# Altium PCB PCB_Alvaro.PcbDoc
Units mm, origin at the board's own origin, x right, y up, seen from the top; angles counter-clockwise.
Board outline 65.26 x 58.66 mm, 2 copper layers (Top Layer, Bottom Layer); 22 components, 36 nets, 127 pads, 0 vias.
Unrouted connection lines stored in the file: 10.
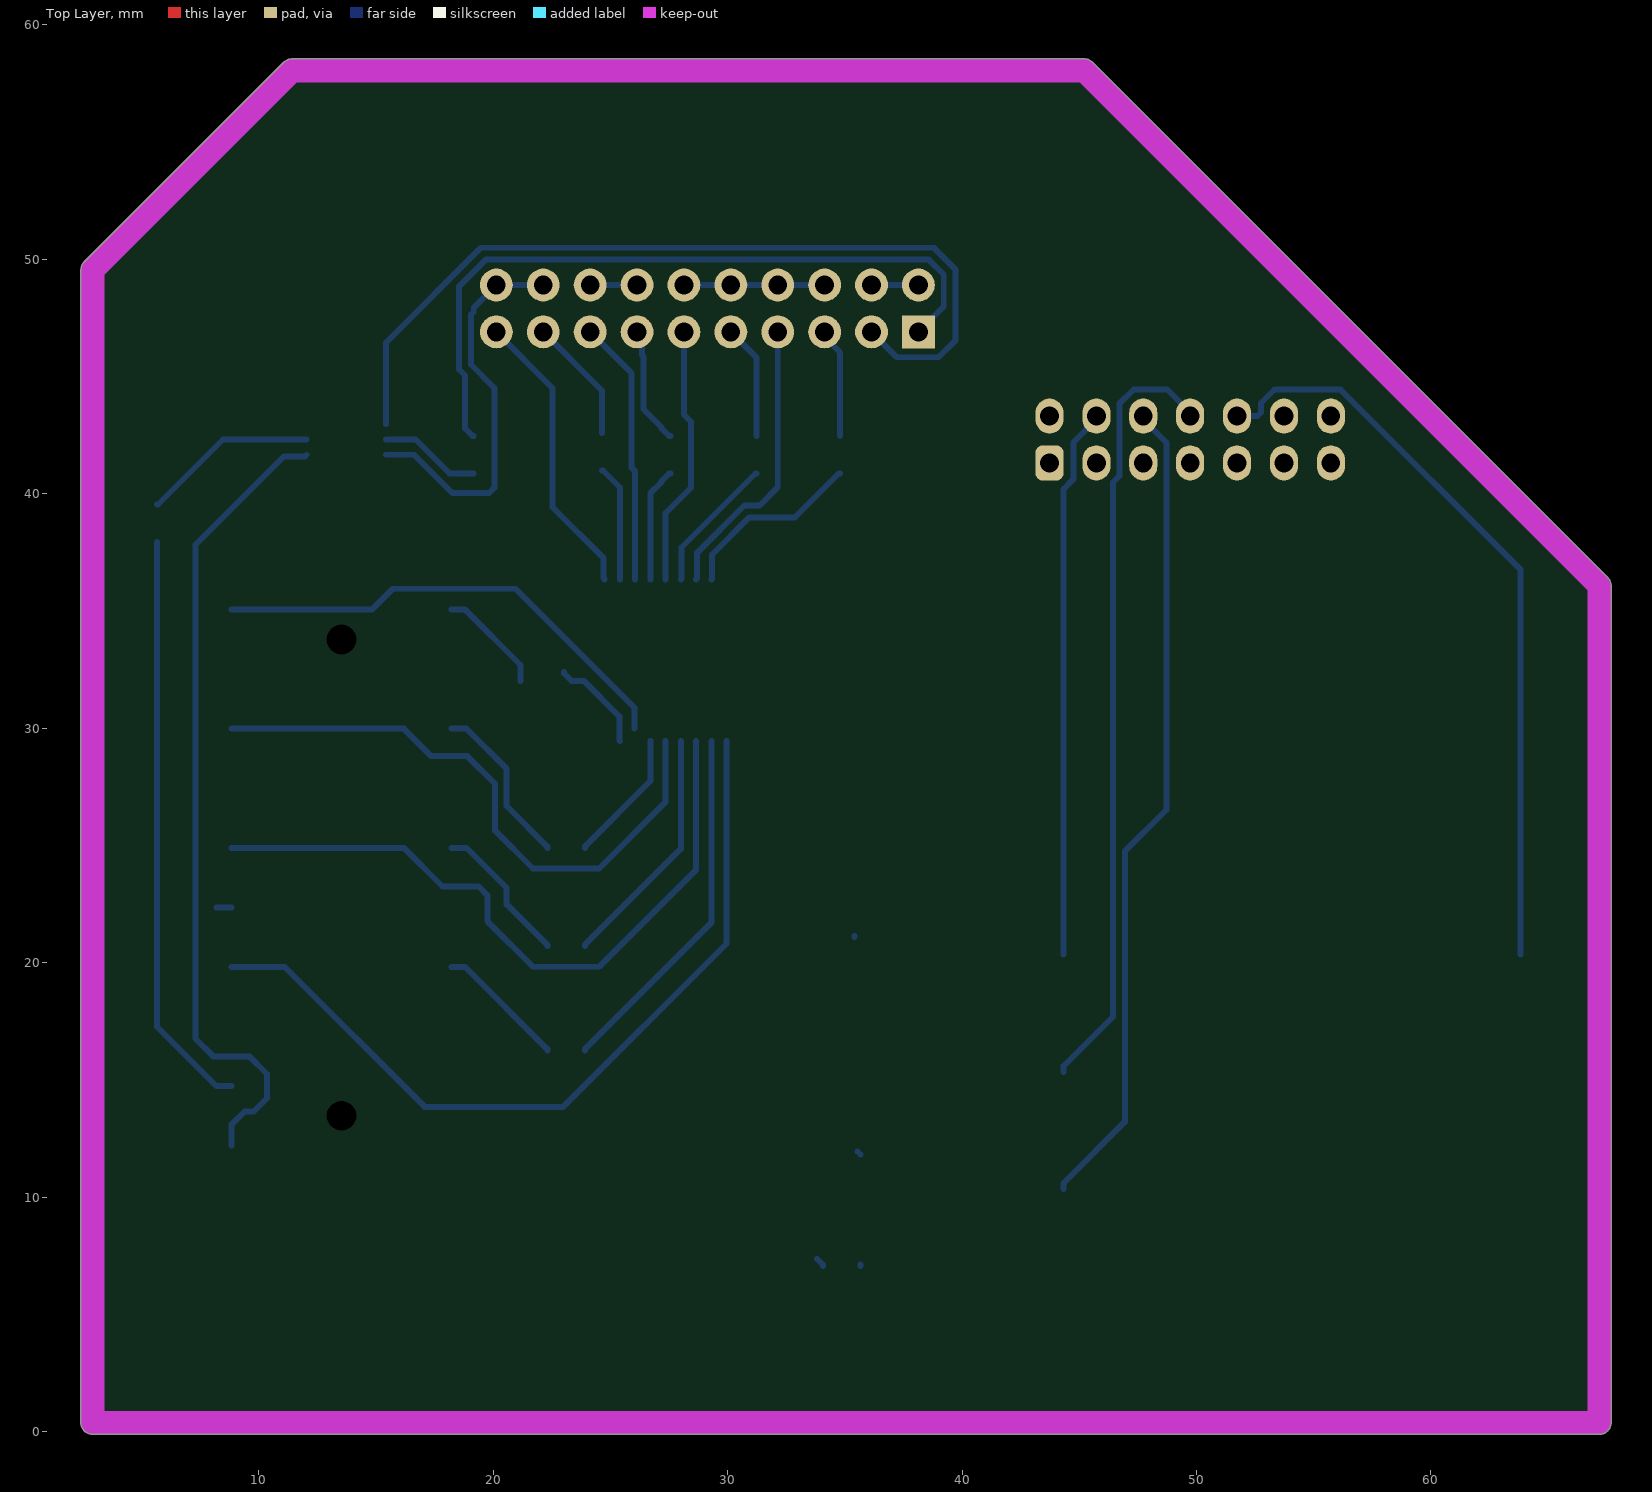
[diagram p0: Top Layer view]
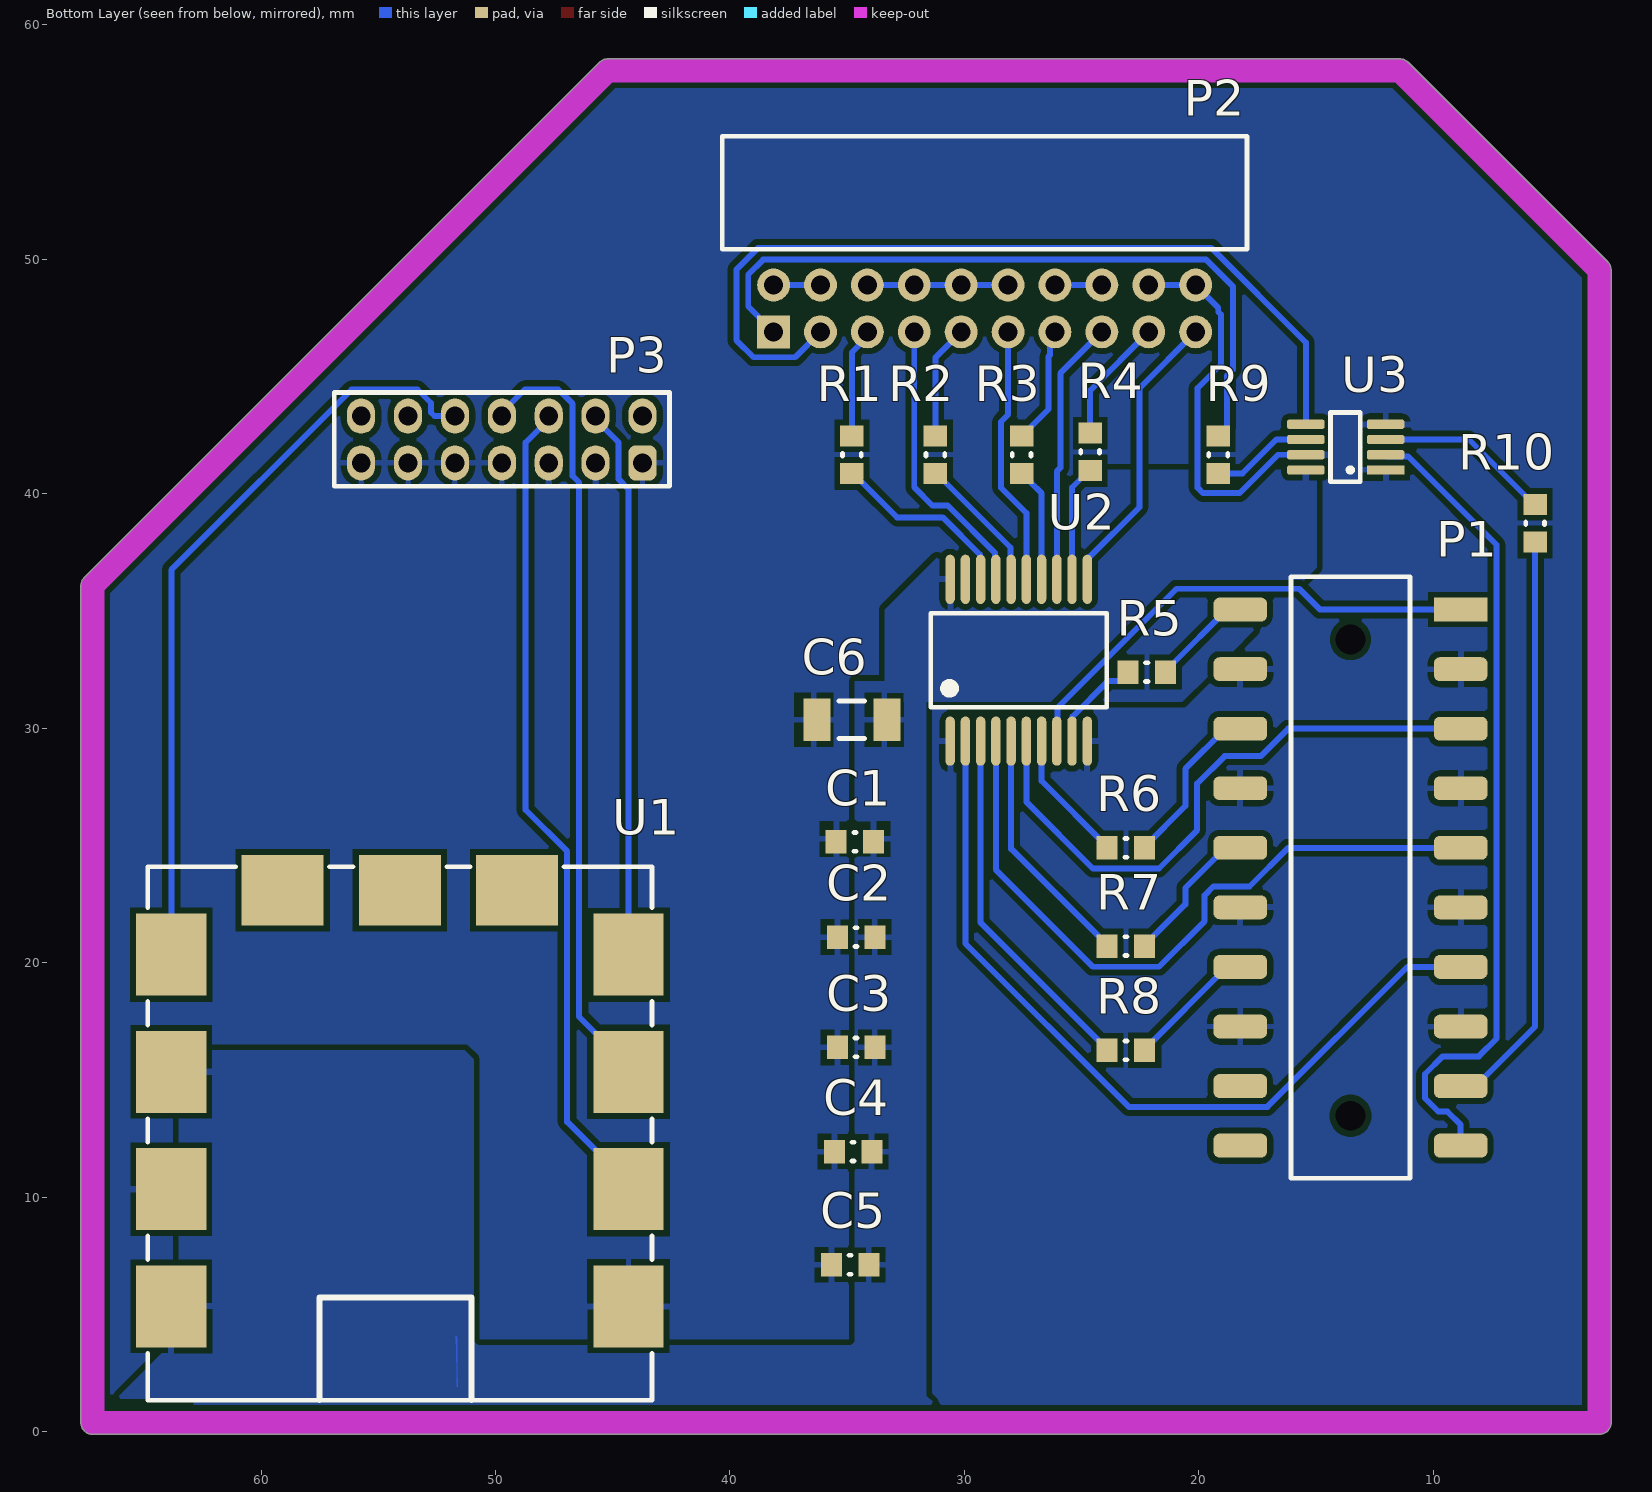
[diagram p1: Bottom Layer view, seen from below]

## Layer stack, top to bottom
Top Solder: solder mask 0.0102, Solder Resist, Dk 3.5
Top Layer: signal copper 0.0356
Dielectric 1: dielectric 0.32, FR-4, Dk 4.8
Bottom Layer: signal copper 0.0356
Bottom Solder: solder mask 0.0102, Solder Resist, Dk 3.5

## Board outline
2.421,0.508 2.421,49.53 cw(c2.921,49.53) 2.567,49.884 11.076,58.393 cw(c11.43,58.039) 11.43,58.539 45.212,58.539 cw(c45.212,58.039) 45.566,58.393 67.537,36.422 cw(c67.183,36.068) 67.683,36.068 67.683,0.381 cw(c67.183,0.381) 67.183,-0.119 2.921,-0.119 cw(c2.921,0.381)

## Design rules (kind name [scope] priority, off if disabled: settings)
Clearance [All] p1: gap=0.254 ignorepadtopadclearanceinfootprint=FALSE except(0: Arc-Hole Track-Hole SMDPad-Hole THPad-Hole Via-Hole Fill-Hole Poly-Hole Region-Hole Text-Hole)
PolygonConnect [All] p1: connectstyle=Relief reliefconductorwidth=0.254 reliefentries=4 polygonreliefangle="90 Angle" airgapwidth=0.254
RoutingVias [All] p1: holewidth=0.711 width=1.27 viastyle="Through Hole" minholewidth=0.711 minwidth=1.27 maxholewidth=0.711 maxwidth=1.27
SolderMaskExpansion [All] p1: expansion=0.102 istentingtop=FALSE
Width [All] p1: maxlimit=0.254 minlimit=0.254 preferedwidth=0.254
30 further rules are at their usual default settings.

## Components (designator, comment, footprint, x,y, rotation, side; value= is the part's Value field where it differs from the comment)
C1 "Cap" CAPC0603(1608)100_N 34.671,25.146 r180 bottom value="100 nF"
C2 "Cap" CAPC0603(1608)100_N 34.618,21.082 r180 bottom value="1 nF"
C3 "Cap" CAPC0603(1608)100_N 34.618,16.383 r180 bottom value="100 nF"
C4 "Cap" CAPC0603(1608)100_N 34.745,11.938 r180 bottom value="1 nF"
C5 "Cap" CAPC0603(1608)100_N 34.872,7.112 r180 bottom value="100 nF"
C6 "Cap" CAPC1206(3216)100_N 34.798,30.353 r180 bottom value="10 uF"
P1 "SSM-110-x-DV-LC" SSM-110-X-DV-LC 8.837,35.052 r180 bottom
P2 "LTMM-110-02-x-D-RA" LTMM-110-02-X-D-RA 38.141,46.895 r90 bottom
P3 "PTF-107-xx-L-D" PTF-107-XX-L-D 43.731,41.307 r270 bottom
R1 "Res3" RESC0603(1608)_N 34.798,41.656 r90 bottom value=100R
R2 "Res3" RESC0603(1608)_N 31.242,41.656 r90 bottom value=100R
R3 "Res3" RESC0603(1608)_N 27.559,41.656 r90 bottom value=100R
R4 "Res3" RESC0603(1608)_N 24.638,41.783 r90 bottom value=100R
R5 "Res3" RESC0603(1608)_N 22.225,32.385 r180 bottom value=100R
R6 "Res3" RESC0603(1608)_N 23.114,24.892 r180 bottom value=100R
R7 "Res3" RESC0603(1608)_N 23.114,20.701 r180 bottom value=100R
R8 "Res3" RESC0603(1608)_N 23.114,16.256 r180 bottom value=100R
R9 "Res3" RESC0603(1608)_N 19.177,41.656 r90 bottom value=100R
R10 "Res3" RESC0603(1608)_N 5.662,38.735 r270 bottom value=100R
U1 "JTAG-SMT2" JTAG-SMT2 54.078,12.834 r0 bottom
U2 "SN74LVC244ADB" DB020_N 27.686,32.893 r90 bottom
U3 "SN74LVC2G241DCTR" DCT08_N 12.041,41.006 r0 bottom

## Footprints (in the part's own frame and the unit in brackets; to place one, negate y for a bottom-side part, rotate by r counter-clockwise, add the part's x,y. Pads: shape width x height; smd on the part's side, far side on the other; paste and mask are expansions set on the pad)
CAPC0603(1608)100_N [mm] "Chip Capacitor, Body 1.6x0.8mm, Height 1.0mm, IPC Medium Density"
  rect 0.9x1 smd: 1(-0.8,0) 2(0.8,0)
  silkscreen extent -0.05,-0.4 0.05,0.4, body extent -0.87,-0.48 0.88,0.47, height 1
CAPC1206(3216)100_N [mm] "Chip Capacitor, Body 3.2x1.6mm, Height 1mm, IPC Medium Density"
  rect 1.15x1.8 smd: 1(-1.5,0) 2(1.5,0)
  silkscreen extent -0.55,-0.8 0.55,0.8, body extent -1.7,-0.9 1.7,0.9, height 1
DB020_N [mm] "SOP, 20-Leads, Body 7.2x5.3mm, Pitch 0.65mm, IPC Medium Density"
  oval 2.1x0.4 smd: 1(-3.45,2.925) 2(-3.45,2.275) 3(-3.45,1.625) 4(-3.45,0.975) 5(-3.45,0.325) 6(-3.45,-0.325) 7(-3.45,-0.975) 8(-3.45,-1.625) 9(-3.45,-2.275) 10(-3.45,-2.925) 11(3.45,-2.925) 12(3.45,-2.275) 13(3.45,-1.625) 14(3.45,-0.975) 15(3.45,-0.325) 16(3.45,0.325) 17(3.45,0.975) 18(3.45,1.625) 19(3.45,2.275) 20(3.45,2.925)
  silkscreen extent -2,-3.75 2,3.75, body extent -2.7,-3.75 2.7,3.75, height 2
DCT08_N [mm]
  rect 1.6x0.4 smd: 1(0,0)
  rrect50% 1.6x0.4 smd: 2(0,-0.65) 3(0,-1.3) 4(0,-1.95) 5(3.4,-1.95) 6(3.4,-1.3) 7(3.4,-0.65) 8(3.4,0)
  silkscreen extent 1.07,-2.45 2.35,0.5
JTAG-SMT2 [mm]
  rect 3x3.5 smd: 1(-9.75,7.5) 2(-9.75,2.5) 3(-9.75,-2.5) 4(-9.75,-7.5) 8(9.75,-7.5) 9(9.75,-2.5) 10(9.75,2.5) 11(9.75,7.5)
  rect 3.5x3 smd: 5(-5,-10.25) 6(0,-10.25) 7(5,-10.25)
  silkscreen extent -10.75,-11.25 10.75,11.5
LTMM-110-02-X-D-RA [mm]
  rect 1.4x1.4 hole 0.8: 1(0,0)
  round 1.4 hole 0.8: 2(2,0) 3(0,-2) 4(2,-2) 5(0,-4) 6(2,-4) 7(0,-6) 8(2,-6) 9(0,-8) 10(2,-8) 11(0,-10) 12(2,-10) 13(0,-12) 14(2,-12) 15(0,-14) 16(2,-14) 17(0,-16) 18(2,-16) 19(0,-18) 20(2,-18)
  silkscreen extent 3.52,-20.19 8.35,2.19
PTF-107-XX-L-D [mm]
  rrect50% 1.5x1.2 hole 0.8: 1(0,0)
  oval 1.5x1.2 hole 0.8: 2(-2,0) 3(0,-2) 4(-2,-2) 5(0,-4) 6(-2,-4) 7(0,-6) 8(-2,-6) 9(0,-8) 10(-2,-8) 11(0,-10) 12(-2,-10) 13(0,-12) 14(-2,-12)
  silkscreen extent -3,-13.15 1,1.15
RESC0603(1608)_N [mm] "Chip Resistor, Body 1.6x0.8mm, IPC Medium Density"
  rect 0.9x1 smd: 1(-0.8,0) 2(0.8,0)
  silkscreen extent -0.05,-0.4 0.05,0.4, body extent -0.85,-0.47 0.85,0.47, height 0.6
SSM-110-X-DV-LC [mil]
  rect 90x40 smd: 1(0,0)
  rrect50% 90x40 smd: 2(-370,0) 3(0,-100) 4(-370,-100) 5(0,-200) 6(-370,-200) 7(0,-300) 8(-370,-300) 9(0,-400) 10(-370,-400) 11(0,-500) 12(-370,-500) 13(0,-600) 14(-370,-600) 15(0,-700) 16(-370,-700) 17(0,-800) 18(-370,-800) 19(0,-900) 20(-370,-900)
  round 0 hole 50 unplated: LC1(-185,-50) LC2(-185,-850)
  silkscreen extent -285,-955 -85,55

## Part data
C1 C2 C3 C4 C5 C6: "Capacitor", LatestRevisionDate=17-Jul-2002, LatestRevisionNote="Re-released for DXP Platform.", PackageDescription="Radial Cap, Thru-Hole; 2 Leads; 0.3 in Pin Spacing", PackageReference=RAD-0.3, Published=8-Jun-2000, Publisher="Altium Limited"
P1: "Samtec SSM-110-x-DV-LC", LatestRevisionDate=17-Jul-2002, LatestRevisionNote="Re-released for DXP Platform.", Publisher="Altium Limited"
P2: "Samtec LTMM-110-02-x-D-RA", LatestRevisionDate=17-Jul-2002, LatestRevisionNote="Re-released for DXP Platform.", Publisher="Altium Limited"
P3: "Samtec PTF-107-xx-L-D", LatestRevisionDate=17-Jul-2002, LatestRevisionNote="Re-released for DXP Platform.", Publisher="Altium Limited"
R1 R2 R3 R4 R5 R6 R7 R8 R9 R10: "Resistor", LatestRevisionDate=29-May-2009, LatestRevisionNote="IPC-7351 Footprint Added.", PackageDescription="Chip Resistor", PackageReference=J1-0603, Published=8-Jun-2000, Publisher="Altium Limited"
U1: library part JTAG_SMT2
U2: "Octal Buffer/Driver with 3-State Outputs", Code_IPC=SOP65P780-20, Code_JEDEC=MO-150-AE, ComponentLink1Description="Manufacturer Link", ComponentLink1URL=http://www.ti.com/, ComponentLink2Description=Datasheet, ComponentLink2URL=http://www-s.ti.com/sc/ds/sn74lvc244a.pdf, DatasheetVersion=Apr-1999, LatestRevisionDate=16-Oct-2006, LatestRevisionNote="IPC-7351 Footprint Added.", PackageDescription="20-Pin Plastic Small Outline Package 0.65 mm Pitch", PackageReference=DB020, PackageVersion=May-1999, Published=8-Jun-2000, Publisher="Altium Limited"
U3: "Quadruple Bus Buffer Gate with 3- State Outputs", Code_JEDEC=MO-092-AB, ComponentLink1Description="Manufacturer Link", ComponentLink1URL=http://www.ti.com/, ComponentLink2Description=Datasheet, ComponentLink2URL=http://www-s.ti.com/sc/ds/sn54abt125.pdf, DatasheetVersion=May-1997, LatestRevisionDate=06-Jun-2005, LatestRevisionNote="Stylized 3D Model Added.", PackageDescription="DFP; 14 Leads; Body 9.9 x 6.6 mm (LxW max); Pitch 1.27 mm", PackageReference=W014, PackageVersion=Jan-1995, Published=8-Jun-2000, Publisher="Altium Limited"

## Nets (pads, with @x,y where several pads share a name; then routed paths per layer and width w, separated by ;. In a path a pad name is that pad's centre, name@x,y a point inside that pad or via, vN(x,y) a via of type N, cw(c..) or ccw(c..) an arc to the next point about the centre after c; other vN are vias at no path point)
GND: C1.1 C2.1 C3.1 C4.1 C5.1 C6.1 P1.3 P1.4 P1.7 P1.8 P1.11 P1.12 P1.15 P1.16 P2.2 P2.4 P2.6 P2.8 P2.10 P2.12 P2.14 P2.16 P2.18 P2.20 P3.1 P3.3 P3.5 P3.7 P3.9 P3.11 P3.13 U1.1 U1.10 U2.1 U2.10 U2.19 U3.1 U3.4 U3.7 | length 28
  Bottom Layer w0.254: P1.11@8.202,22.352 P1.11 ; U3.7 16.631,41.656 18.262,40.025 19.835,40.025 20.058,40.248 20.058,44.504 19.06,45.503 19.06,47.635 19.177,47.752 19.177,47.931 P2.20 P2.18 ; P2.16 P2.14 ; P2.12 P2.10 P2.8 P2.6 ; C2.1 C2.1@35.418,21.132 ; C4.1 C4.1@35.672,11.811 ; C5.1@35.672,7.062 C5.1 ; P2.4 P2.2 ; P3.1@43.731,41.157 P3.1
IN0: P2.3 U3.5 | length 37.2
  Bottom Layer w0.254: U3.5 15.441,46.442 19.482,50.484 38.799,50.484 39.73,49.553 39.73,46.545 38.998,45.814 37.222,45.814 P2.3
IN1: P2.7 U2.17 | length 12.4
  Bottom Layer w0.254: U2.17 28.689,36.371 28.689,37.461 30.719,39.491 31.366,39.491 32.141,40.266 P2.7
IN2: P2.11 U2.15 | length 11.1
  Bottom Layer w0.254: U2.15 27.361,39.169 28.44,40.248 28.44,43.064 28.141,43.363 P2.11
IN3: P2.15 U2.13 | length 11.3
  Bottom Layer w0.254: P2.15 25.908,45.128 25.908,41.101 26.061,40.948 U2.13
IN4: P2.19 U2.11 | length 12.5
  Bottom Layer w0.254: P2.19 22.537,44.499 22.537,39.417 24.713,37.241 24.713,36.391 U2.11
MICTOR01: P1.19 U3.2 | length 35
  Bottom Layer w0.254: P1.19 8.837,13.081 9.404,13.648 9.794,13.648 10.361,14.215 10.361,15.249 9.608,16.002 8.066,16.002 7.313,16.755 7.313,37.817 11.083,41.587 11.972,41.587 U3.2
MICTOR02: P1.17 R10.2 | length 24.9
  Bottom Layer w0.254: R10.2 5.662,17.272 8.202,14.732 P1.17
MICTOR03: P1.13 U2.2 | length 35.1
  Bottom Layer w0.254: P1.13 11.114,19.812 17.083,13.843 22.99,13.843 29.961,20.814 U2.2
MICTOR04: P1.9 U2.4 | length 29.8
  Bottom Layer w0.254: P1.9 16.194,24.892 17.845,23.241 19.387,23.241 19.759,22.869 19.759,21.768 21.706,19.82 24.522,19.82 28.661,23.959 U2.4
MICTOR05: P1.5 U2.6 | length 25.9
  Bottom Layer w0.254: P1.5 16.194,29.972 17.363,28.803 18.905,28.803 20.074,27.634 20.074,25.644 21.706,24.011 24.522,24.011 27.361,26.85 U2.6
MICTOR06: P1.1 U2.8 | length 20.6
  Bottom Layer w0.254: P1.1 14.832,35.052 15.721,35.941 20.958,35.941 26.033,30.866 U2.8@26.033,29.982
MICTOR07: P1.2 R5.2 | length 4.6
  Bottom Layer w0.254: P1.2 18.808,35.052 21.171,32.689 R5.2@21.171,32.012
MICTOR08: P1.6 R6.2 | length 7.1
  Bottom Layer w0.254: P1.6 18.87,29.972 20.582,28.26 20.582,26.674 22.314,24.942 R6.2
MICTOR09: P1.14 R8.2 | length 5.6
  Bottom Layer w0.254: P1.14 18.808,19.812 22.314,16.306 R8.2
MICTOR10: P1.10 R7.2 | length 6.3
  Bottom Layer w0.254: P1.10 18.87,24.892 20.582,23.18 20.582,22.483 22.314,20.751 R7.2
NetR1_1: R1.1 U2.18 | length 8
  Bottom Layer w0.254: U2.18 29.339,36.371 29.339,37.393 30.93,38.983 32.875,38.983 34.748,40.856 R1.1
NetR2_1: R2.1 U2.16 | length 5.9
  Bottom Layer w0.254: U2.16 28.039,36.371 28.039,37.703 31.192,40.856 R2.1
NetR3_1: R3.1 U2.14 | length 4.9
  Bottom Layer w0.254: U2.14 26.711,40.008 27.186,40.483 27.186,40.533 27.509,40.856 R3.1
NetR4_1: R4.1 U2.12 | length 5
  Bottom Layer w0.254: R4.1 24.688,40.983 25.411,40.26 U2.12
NetR5_1: R5.1 U2.9 | length 4.2
  Bottom Layer w0.254: R5.1 23.025,32.335 23.348,32.012 23.864,32.012 25.383,30.493 25.383,29.471 U2.9
NetR6_1: R6.1 U2.7 | length 5.7
  Bottom Layer w0.254: R6.1 23.914,24.942 26.711,27.739 U2.7
NetR7_1: R7.1 U2.5 | length 10.4
  Bottom Layer w0.254: R7.1 23.914,20.751 28.011,24.848 U2.5
NetR8_1: R8.1 U2.3 | length 15.4
  Bottom Layer w0.254: R8.1 23.914,16.306 29.311,21.703 U2.3
NetR9_1: R9.1 U3.6 | length 4.3
  Bottom Layer w0.254: U3.6 16.699,42.306 18.149,40.856 R9.1
NetR10_1: R10.1 U3.3 | length 7.5
  Bottom Layer w0.254: R10.1 5.712,39.535 8.483,42.306 U3.3
OUT0: P2.1 R9.2 | length 31
  Bottom Layer w0.254: R9.2 19.127,42.456 18.804,42.779 18.804,45.04 18.552,45.292 18.552,48.835 19.693,49.976 38.588,49.976 39.222,49.343 39.222,47.976 P2.1
OUT1: P2.5 R1.2 | length 4.7
  Bottom Layer w0.254: P2.5 34.141,46.681 34.798,46.024 R1.2
OUT2: P2.9 R2.2 | length 4.9
  Bottom Layer w0.254: P2.9 31.242,45.794 R2.2
OUT3: P2.13 R3.2 | length 5.4
  Bottom Layer w0.254: P2.13@25.921,46.676 P2.13 26.36,46.676 26.36,45.903 26.416,45.847 26.416,43.599 27.186,42.829 27.186,42.779 27.509,42.456 R3.2
OUT4: P2.17 R4.2 | length 5.3
  Bottom Layer w0.254: P2.17 24.638,44.398 R4.2
TCK: P3.6 U1.2 | length 35.2
  Bottom Layer w0.254: U1.2 44.328,10.584 46.947,13.203 46.947,24.742 48.712,26.507 48.712,42.176 47.731,43.157 P3.6
TDI: P3.10 U1.8 | length 32.4
  Bottom Layer w0.254: P3.10 52.601,43.307 52.75,43.456 52.75,43.863 53.324,44.438 56.137,44.438 63.828,36.747 U1.8
TDO: P3.8 U1.3 | length 33.3
  Bottom Layer w0.254: U1.3 44.328,15.584 46.439,17.695 46.439,40.478 46.712,40.751 46.712,43.825 47.324,44.438 48.75,44.438 49.731,43.457 P3.8
TMS: P3.4 U1.4 | length 23.6
  Bottom Layer w0.254: U1.4 44.328,40.191 44.75,40.613 44.75,42.176 45.731,43.157 P3.4
VCC: C1.2 C2.2 C3.2 C4.2 C5.2 C6.2 P3.2 U1.9 U1.11 U2.20 U3.8 | length 0.4
  Bottom Layer w0.254: C5.2@33.818,7.366 C5.2 C5.2@34.072,7.062
pads on no net: P1.18 P1.20 P1.LC1 P1.LC2 P3.12 P3.14 U1.5 U1.6 U1.7

## Polygon pours and split planes (outlines as drawn)
VCC on Bottom Layer "VCC_L02_P000" (solid, pour order 0): 51.471,1.907 51.562,1.998 51.562,3.683 34.417,3.683 33.401,2.667 33.782,2.286
VCC on Bottom Layer "VCC_L02_P002" (solid, pour order 2): 66.548,1.016 31.115,1.016 31.623,1.524 31.623,32.004 34.671,32.004 34.671,3.204
VCC on Bottom Layer "VCC_L02_P003" (solid, pour order 3): 14.986,41.021 14.986,36.83 20.701,31.115 33.401,31.115 33.401,35.052 27.447,41.006 15.441,41.006
VCC on Bottom Layer "VCC_L02_P004" (solid, pour order 4): 50.927,15.875 51.308,16.256 63.5,16.256 63.5,4.064 66.167,1.397 50.927,1.397
GND on Bottom Layer "GND_L02_P006" (solid, pour order 6): 2.921,0.127 2.794,0.254 2.794,49.657 11.557,58.42 11.811,58.166 45.085,58.166 67.183,36.068 67.183,0.254
VCC on Bottom Layer "VCC_L02_P007" (solid, pour order 7): 51.689,1.905 51.689,3.81 34.544,3.81 33.401,2.667 34.163,1.905 51.562,1.905
VCC on Bottom Layer "VCC_L02_P008" (solid, pour order 8): 51.562,1.905 51.562,3.683 51.435,3.81 51.308,3.683 34.036,3.683 34.036,2.54 33.782,2.286
VCC on Bottom Layer "VCC_L02_P009" (solid, pour order 9): 51.689,1.905 51.689,3.429 33.782,3.429 33.147,2.794 34.036,1.905 51.562,1.905
VCC on Bottom Layer "VCC_L02_P010" (solid, pour order 10): 51.625,1.905 51.625,4 51.689,4.064

## Keep-outs
Keep-Out Layer:
  lines w1: 2.921,0.381 67.183,0.381 67.183,36.068 45.212,58.039 11.43,58.039 2.921,49.53 2.921,0.508